# Altium PCB Micromouse_1_2.PcbDoc (part 1 of 2)
Units mm, origin at the board's own origin, x right, y up, seen from the top; angles counter-clockwise.
Board outline 75.15 x 101.5 mm, 2 copper layers (Top Layer, Bottom Layer); 116 components, 82 nets, 352 pads, 175 vias.
Unrouted connection lines stored in the file: 17.
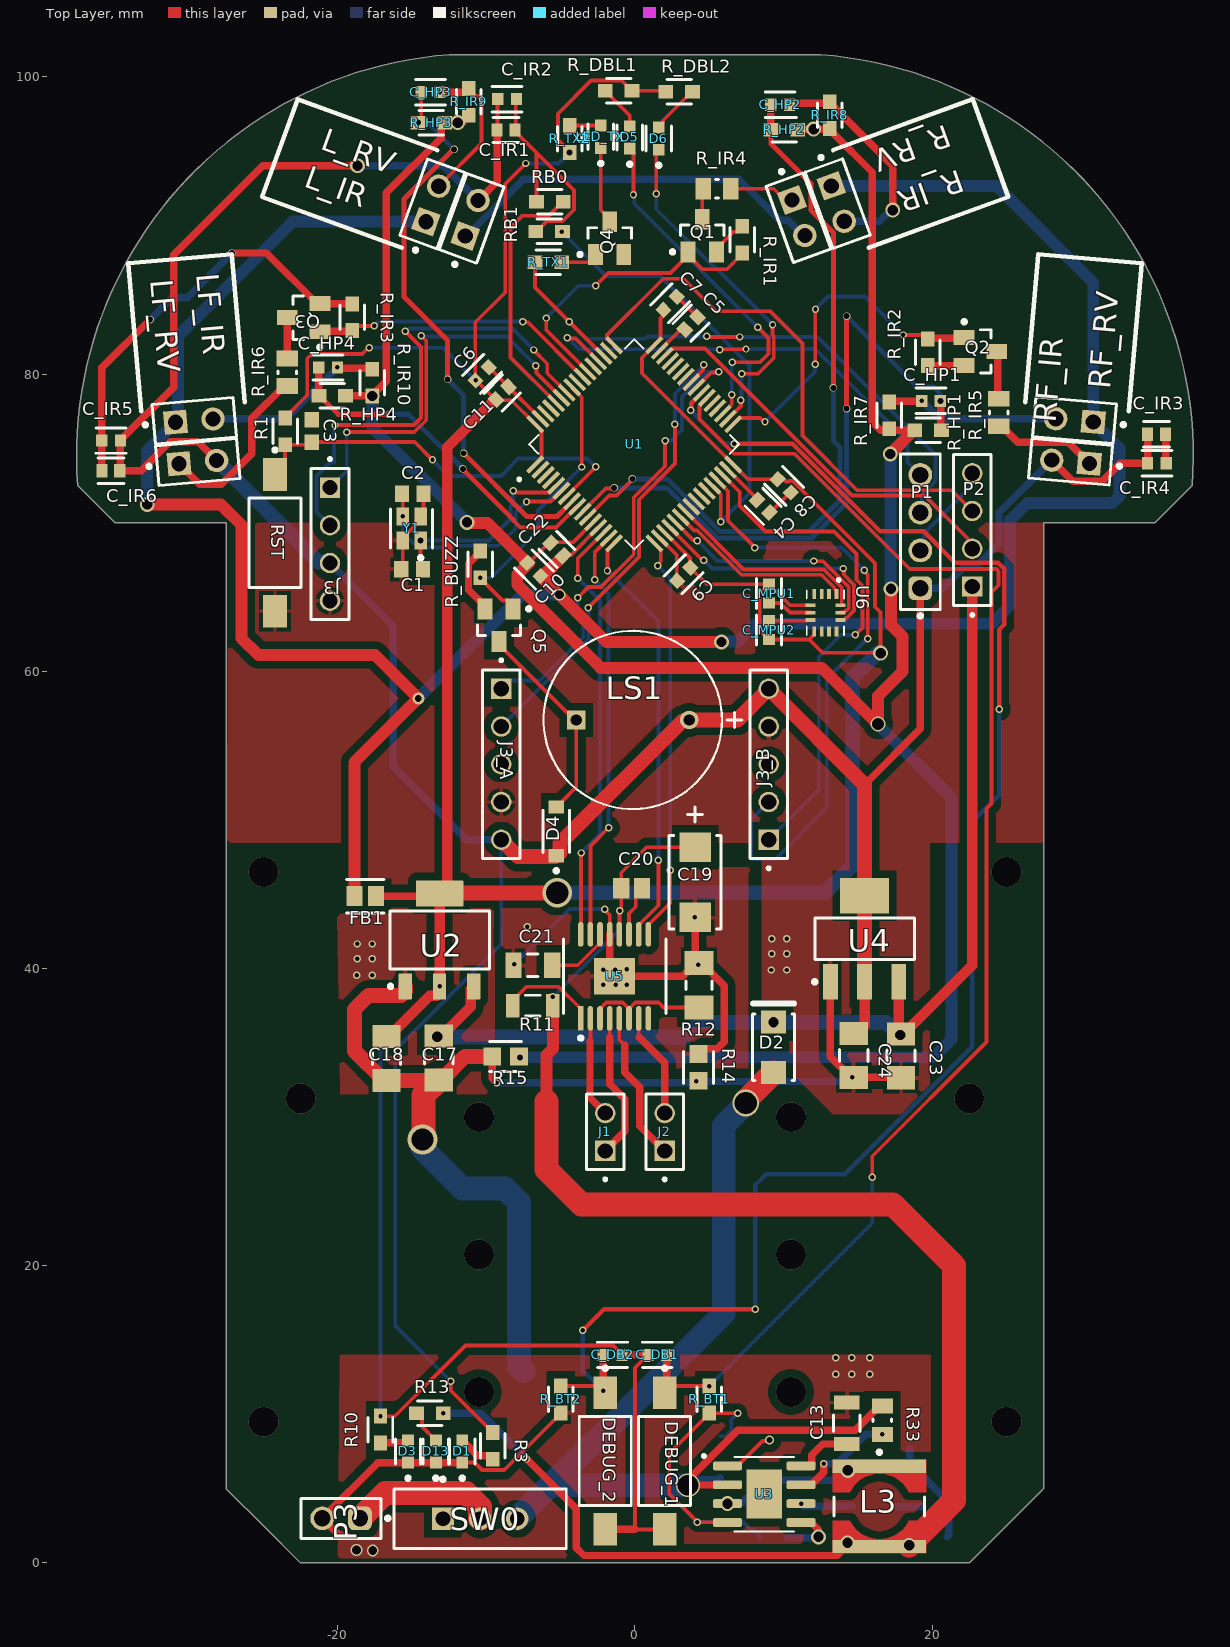
[diagram p0: Top Layer view]
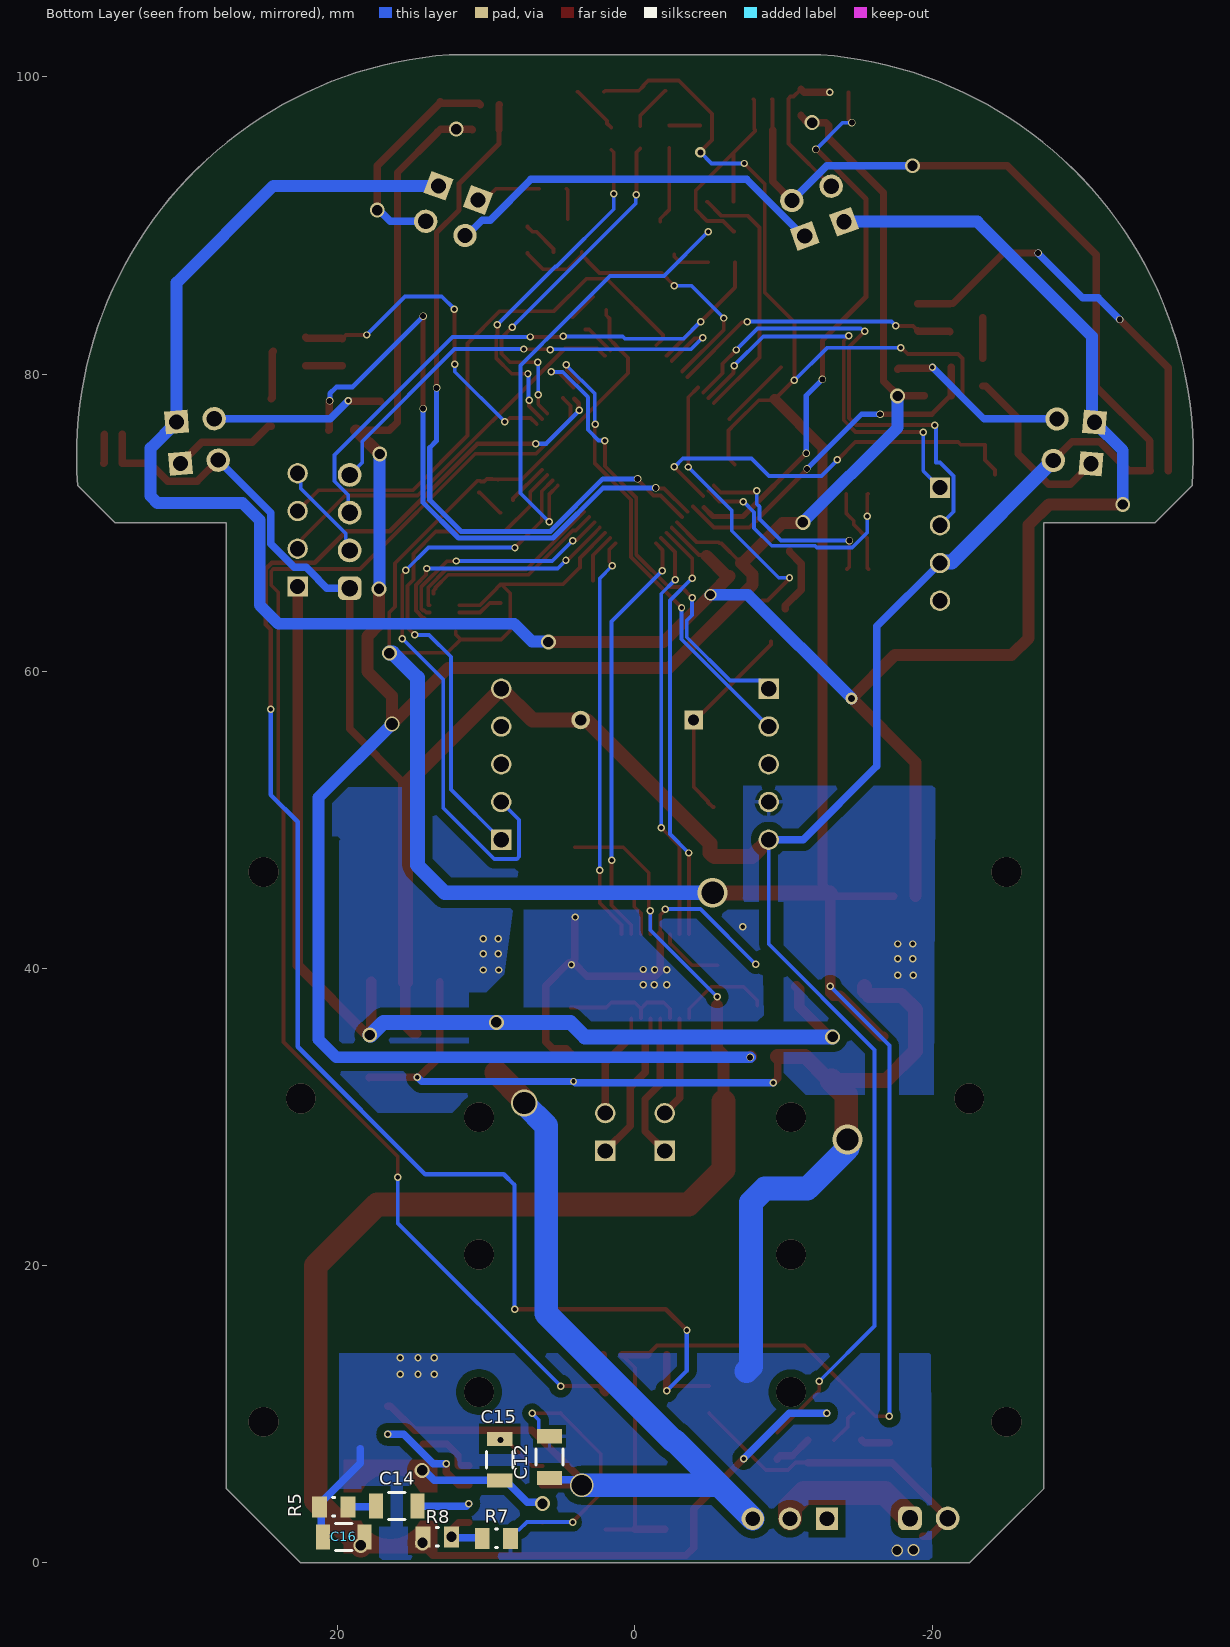
[diagram p1: Bottom Layer view, seen from below]
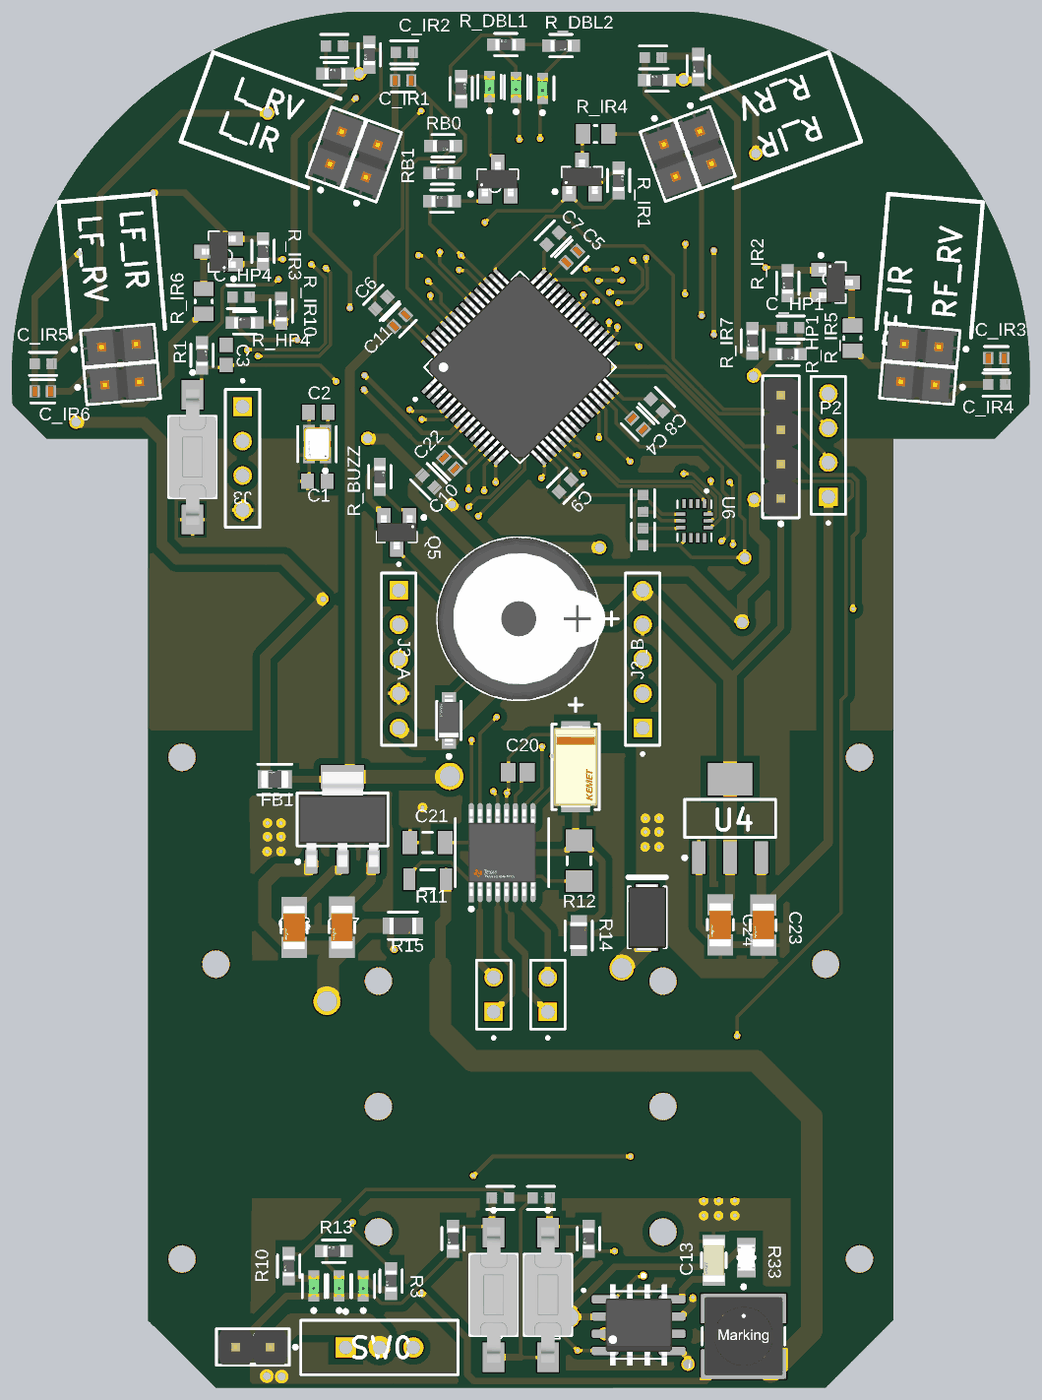
[diagram p3: 3D render of the assembled board from above, using the file's embedded part models]
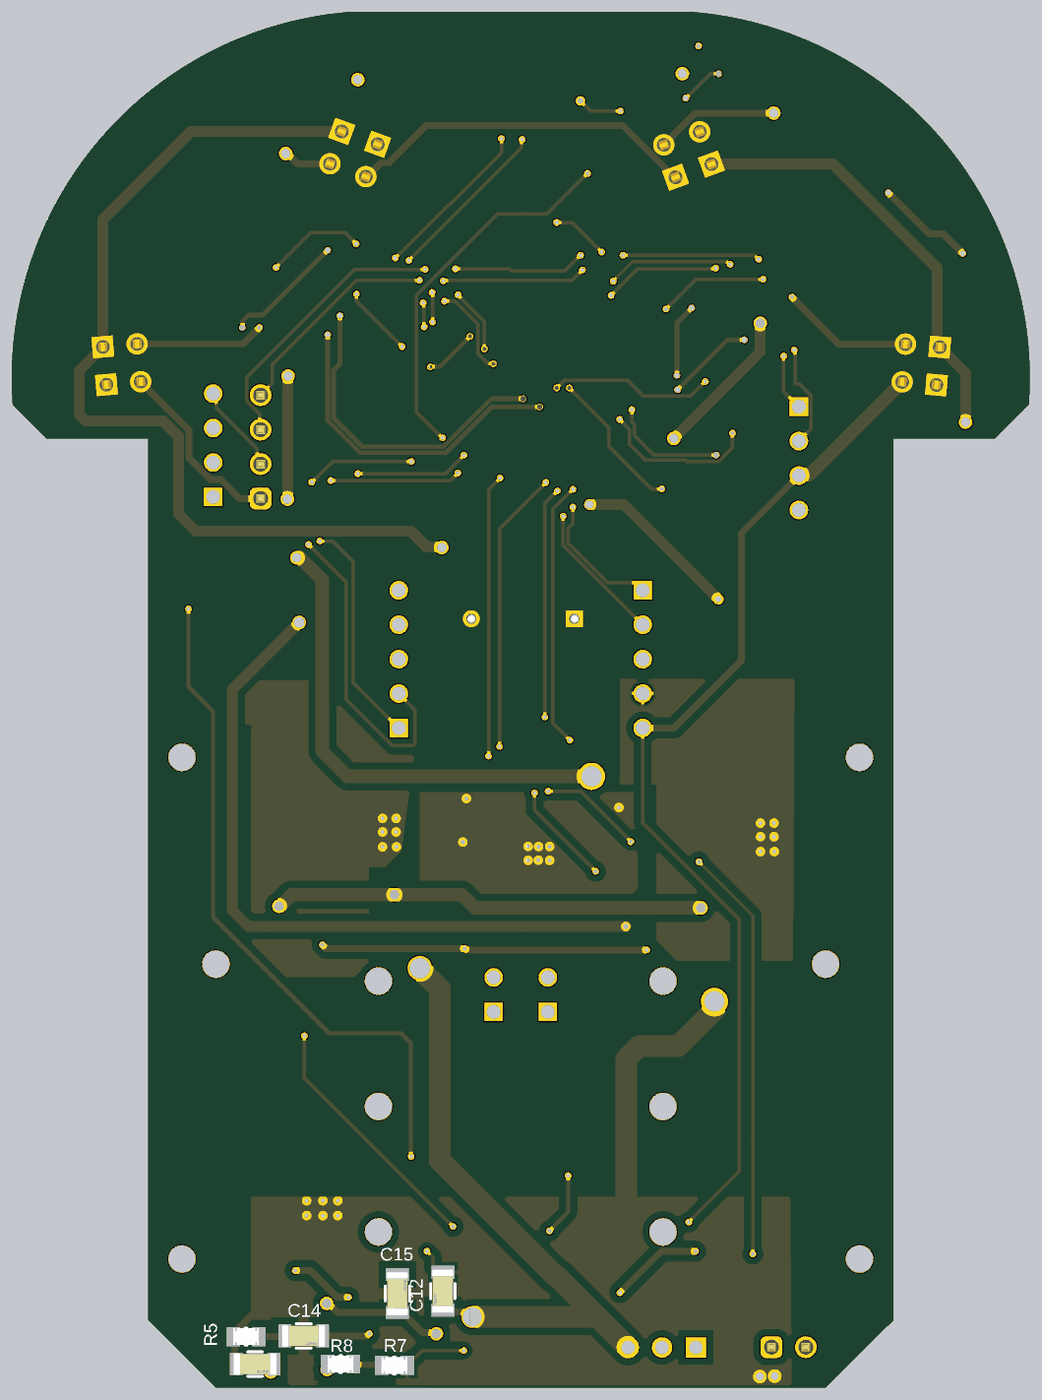
[diagram p4: 3D render of the assembled board from below, using the file's embedded part models]

## Layer stack, top to bottom
Top Solder: solder mask 0.0102, Solder Resist, Dk 3.5
Top Layer: signal copper 0.0356
Dielectric 1: dielectric 0.32, FR-4, Dk 4.8
Bottom Layer: signal copper 0.0356
Bottom Solder: solder mask 0.0102, Solder Resist, Dk 3.5

## Board outline
-27.5,4.975 -27.4,4.875 -24.988,2.487 -22.5,0 22.512,0.012 27.375,4.875 27.5,5 27.5,15.65 27.5,70 35,70 37.5,72.5 ccw(c10.5,74.5) 12.5,101.5 -12.5,101.5 ccw(c-10.5,74.5) -37.5,72.5 -35,70 -27.5,70

## Design rules (kind name [scope] priority, off if disabled: settings)
Clearance Clearance_U1_FinePitch [InComponent('U1') OR InComponent('R13') OR InComponent('R3') OR InComponent('R10') vs InComponent('U1') OR InComponent('R13') OR InComponent('R3') OR InComponent('R10')] p1: gap=0.1 ignorepadtopadclearanceinfootprint=FALSE
Clearance Clearance_1 [All] p2: gap=0.1 ignorepadtopadclearanceinfootprint=FALSE
Creepage [All] p1: checkdistance=0.5 applytopolygonpour=TRUE
PolygonConnect [All] p1: connectstyle=Relief reliefconductorwidth=0.254 reliefentries=4 polygonreliefangle="90 Angle" airgapwidth=0.254
RoutingVias [All] p1: holewidth=0.7 width=1 viastyle="Through Hole" minholewidth=0.3 minwidth=0.5 maxholewidth=1.5 maxwidth=2
SilkToSilkClearance [All] p1: silktosilkclearance=0.1
SolderMaskExpansion [All] p1: expansion=0.102 istentingtop=FALSE
SupplyNets "Schematic Supply Nets" [InNet('MGND')] p1: voltage=0.000
SupplyNets "Schematic Supply Nets_12" [InNet('V_ST')] p2: voltage=0.000
SupplyNets "Schematic Supply Nets_11" [InNet('AGND')] p3: voltage=0.000
SupplyNets "Schematic Supply Nets_10" [InNet('5V')] p4: voltage=0.000
SupplyNets "Schematic Supply Nets_9" [InNet('3.3V')] p5: voltage=0.000
SupplyNets "Schematic Supply Nets_7" [InNet('VA3.3')] p6: voltage=0.000
SupplyNets "Schematic Supply Nets_8" [InNet('VM')] p7: voltage=0.000
SupplyNets "Schematic Supply Nets_3" [InNet('GND')] p8: voltage=0.000
SupplyNets "Schematic Supply Nets_2" [InNet('VIN74')] p9: voltage=0.000
UnpouredPolygon UnpouredPolygon_1 [All] p1:
UnpouredPolygon [All] p2:
Width Width_1 [All] p1: maxlimit=1.6 minlimit=0.254 preferedwidth=0.5
28 further rules are at their usual default settings.

## Components (designator, comment, footprint, x,y, rotation, side; value= is the part's Value field where it differs from the comment)
C1 "22pF" CAPC1608X92X38ML15T08 -15,66.875 r0 top
C2 "22pF" CAPC1608X92X38ML15T08 -14.95,71.95 r180 top
C3 "1uF" CAPC1608X90X35NL15T15 -21.75,76.175 r90 top
C4 "2.2 uF" FP-C0603-CG-MFG 8.624,71.101 r315 top value=4.7uF
C5 "2.2uF" FP-C0603-CG-MFG 3.774,83.424 r45 top value=4.7uF
C6 "100nF" FP-CL10-IPC_C -10.282,80.018 r45 top
C7 "100nF" FP-CL10-IPC_C 2.368,84.768 r45 top
C8 "100nF" FP-CL10-IPC_C 10.043,72.482 r315 top
C9 "100nF" FP-CL10-IPC_C 3.282,66.532 r225 top
C10 "100nF" FP-CL10-IPC_C -6.807,66.857 r135 top
C11 "4.7 uF" FP-C0603-CG-MFG -8.926,78.724 r45 top value=4.7uF
C12 "10uF" FP-C1206C-EB-MFG 5.75,7.125 r90 bottom value="10 pF"
C13 "0.1uF" FP-C1206C-EB-MFG 14.25,9.4 r90 top value="10 pF"
C14 "3.9nF" FP-C1206C-EB-MFG 16.025,3.825 r0 bottom value="10 pF"
C15 "10nF" FP-C1206C-EB-MFG 9.1,6.95 r270 bottom value="10 pF"
C16 "22uF" FP-C1206C-EB-MFG 19.6,1.75 r0 bottom value="10 pF"
C17 "106" FP-GRT31C-0_2-IPC_A -13.2,33.975 r270 top
C18 "106" FP-GRT31C-0_2-IPC_A -16.725,33.95 r270 top
C19 "106" FP-T491C-MFG 4.05,45.8 r90 top value=10uF
C20 "103" CAPC2013X88X50LL20T25 -0.225,45.4 r0 top
C21 "225" CAPC3216X180X50LL20T25 -6.875,40.225 r180 top
C22 "4.7 uF" FP-C0603-CG-MFG -5.251,68.201 r135 top value=4.7uF
C23 "106" FP-GRT31C-0_2-IPC_A 17.9,34.125 r270 top
C24 "106" FP-GRT31C-0_2-IPC_A 14.725,34.15 r270 top
C_DB1 "100nF" FP-CL10-IPC_C 1.5,14 r0 top
C_DB2 "100nF" FP-CL10-IPC_C -1.5,14 r180 top
C_HP1 "100nF" FP-CL10-IPC_C 19.923,78.2 r180 top
C_HP2 "100nF" FP-CL10-IPC_C 9.773,98.125 r0 top
C_HP3 "100nF" FP-CL10-IPC_C -13.748,98.975 r0 top
C_HP4 "100nF" FP-CL10-IPC_C -20.648,80.45 r0 top
C_IR1 "4.7 uF" FP-C0603-CG-MFG -8.675,96.425 r0 top value=4.7uF
C_IR2 "100nF" FP-CL10-IPC_C -8.602,98.5 r0 top
C_IR3 "4.7 uF" FP-C0603-CG-MFG 35.1,75.95 r0 top value=4.7uF
C_IR4 "100nF" FP-CL10-IPC_C 35.123,74 r0 top
C_IR5 "100nF" FP-CL10-IPC_C -35.252,75.525 r180 top
C_IR6 "4.7 uF" FP-C0603-CG-MFG -35.275,73.5 r180 top value=4.7uF
C_MPU1 "100nF" FP-CL10-IPC_C 9.025,65.227 r270 top
C_MPU2 "100nF" FP-CL10-IPC_C 9.025,62.773 r90 top
D1 "RED" FP-LTST-C190GKT-MFG -11.625,7.5 r90 top
D2 "SS12-E3/61T" VISH-DO-214AC_V 9.325,34.7 r90 top
D3 "RED" FP-LTST-C190GKT-MFG -15.275,7.5 r90 top
D4 "MMSZ5232B" FP-MA02A-MFG -5.3,49.225 r90 top
D5 "RED" FP-LTST-C190GKT-MFG -0.35,95.925 r90 top
D6 "RED" FP-LTST-C190GKT-MFG 1.6,95.85 r90 top
D13 "RED" FP-LTST-C190GKT-MFG -13.4,7.5 r90 top
DEBUG_1 "" TECO-FSMSMTR_V 2,6.85 r270 top
DEBUG_2 "" TECO-FSMSMTR_V -2,6.85 r270 top
FB1 "1k 100Mhz" FP-BLM21-0_2-t0_85-e0_5-IPC_C -18.151,44.875 r180 top
J1 "TSW-102-07-G-S" SAMTEC_TSW-102-07-G-S -2,29 r90 top
J2 "TSW-102-07-G-S" SAMTEC_TSW-102-07-G-S 2,29 r90 top
J3 "TSW-104-06-L-S" SAMTEC_TSW-104-06-L-S -20.525,72.365 r270 top
J3_A "TSW-105-07-F-S" SAMTEC_TSW-105-07-F-S -9,53.745 r270 top locked
J3_B "TSW-105-07-F-S" SAMTEC_TSW-105-07-F-S 9,53.745 r90 top locked
L3 "10uH" WE-TPC_5818 16.45,3.8 r0 top
L_IR "TSW-102-07-G-S" FP-TSW-102-07-G-S-MFG -10.991,90.485 r70 top locked
L_RV "TSW-102-07-G-S" FP-TSW-102-07-G-S-MFG -13.639,91.451 r70 top locked
LED_TX "RED" FP-LTST-C190GKT-MFG -2.3,95.975 r90 top
LF_IR "TSW-102-07-G-S" FP-TSW-102-07-G-S-MFG -29.417,74.082 r5 top
LF_RV "TSW-102-07-G-S" FP-TSW-102-07-G-S-MFG -29.661,76.872 r5 top locked
LS1 "MCKPX-G1203A-K4056" FP-MCKPX-G1203A-K4056-MFG -0.15,56.725 r0 top
P1 "2.54" 61300411121 19.2,69.405 r90 top
P2 "TSW-104-06-L-S" SAMTEC_TSW-104-06-L-S 22.7,65.71 r90 top
P3 "2.54" 61300211121 -19.775,3 r180 top
Q1 "FDN335N" FAIR-SSOT3L-3_V 4.525,89.325 r90 top
Q2 "" FAIR-SSOT3L-3_V 23.25,81.525 r0 top
Q3 "" FAIR-SSOT3L-3_V -22.3,83.8 r180 top
Q4 "FDN335N" FAIR-SSOT3L-3_V -1.7,89.15 r90 top
Q5 "" FAIR-SSOT3L-3_V -9.15,63.1 r270 top
R1 "10k" FP-CPF0603-MFG -23.525,76.15 r270 top value=10KΩ
R3 "1k" FP-CPF0603-MFG -9.575,7.875 r90 top value=10KΩ
R5 "6.8K" FP-CRCW0805-e3-IPC_B 20.275,3.775 r180 bottom
R7 "10K" FP-CRCW0805-e3-IPC_B 9.326,1.65 r0 bottom
R8 "51K" FP-CRCW0805-e3-IPC_B 13.3,1.75 r180 bottom
R10 "1k" FP-CPF0603-MFG -17.125,8.975 r90 top value=10KΩ
R11 "47k" RESC3216X60X45LL10T20 -6.875,37.5 r180 top
R12 "0.2" RESC3216X89X51ML25T25 4.3,38.875 r90 top
R13 "1k" FP-CPF0603-MFG -13.8,10.075 r0 top value=10KΩ
R14 "o" FP-TFCR0805-MFG 4.275,33.35 r270 top
R15 "o" FP-TFCR0805-MFG -8.7,34.075 r180 top
R33 "100K" FP-CRCW0805-e3-IPC_B 16.65,9.6 r270 top
R_BT1 "47k" FP-CPF0603-MFG 5,11 r90 top value=10KΩ
R_BT2 "47k" FP-CPF0603-MFG -5,11 r90 top value=10KΩ
R_BUZZ "47k" FP-CPF0603-MFG -10.4,67.2 r270 top value=10KΩ
R_DBL1 "1k" FP-CPF0603-MFG -1.1,99.075 r0 top value=10KΩ
R_DBL2 "1k" FP-CPF0603-MFG 2.975,99 r180 top value=10KΩ
R_HP1 "3.3k" FP-CPF0603-MFG 19.725,76.225 r180 top value=10KΩ
R_HP2 "3.3k" FP-CPF0603-MFG 10.05,96.45 r0 top value=10KΩ
R_HP3 "3.3k" FP-CPF0603-MFG -13.7,96.925 r0 top value=10KΩ
R_HP4 "3.3k" FP-CPF0603-MFG -20.375,78.55 r0 top value=10KΩ
R_IR "TSW-102-07-G-S" FP-TSW-102-07-G-S-MFG 10.997,90.527 r290 top locked
R_IR1 "47k" FP-CPF0603-MFG 7.225,89.05 r270 top value=10KΩ
R_IR2 "47k" FP-CPF0603-MFG 19.7,81.475 r90 top value=10KΩ
R_IR3 "47k" FP-CPF0603-MFG -19.025,83.825 r270 top value=10KΩ
R_IR4 "5R6" RESC2013X50X30NL20T20 5.525,92.475 r0 top
R_IR5 "12" RESC2013X50X30NL20T20 24.475,77.425 r270 top
R_IR6 "12" RESC2013X50X30NL20T20 -23.4,80.125 r270 top
R_IR7 "47k" FP-CPF0603-MFG 17.1,77.225 r90 top value=10KΩ
R_IR8 "47k" FP-CPF0603-MFG 13.1,97.425 r90 top value=10KΩ
R_IR9 "47k" FP-CPF0603-MFG -11.175,98.325 r90 top value=10KΩ
R_IR10 "47k" FP-CPF0603-MFG -17.675,79.425 r90 top value=10KΩ
R_RV "TSW-102-07-G-S" FP-TSW-102-07-G-S-MFG 13.647,91.477 r290 top
R_TX1 "100k" FP-CPF0603-MFG -5.825,87.525 r0 top value=10KΩ
R_TX2 "1k" FP-CPF0603-MFG -4.4,95.825 r270 top value=10KΩ
RB0 "47k" FP-CPF0603-MFG -5.725,91.6 r180 top value=10KΩ
RB1 "47k" FP-CPF0603-MFG -5.775,89.6 r0 top value=10KΩ
RF_IR "TSW-102-07-G-S" FP-TSW-102-07-G-S-MFG 29.313,74.099 r175 top locked
RF_RV "TSW-102-07-G-S" FP-TSW-102-07-G-S-MFG 29.578,76.888 r175 top
RST "" TECO-FSMSMTR_V -24.225,68.65 r270 top
SW0 "4mm" ESWI-EG1218_V -10.425,2.975 r0 top
U1 "STM32F405RGT6" QFP50P1200X1200X160-64N -0.05,75.275 r45 top
U2 "LM1117IMP-3.3/NOPB" DCY0004A_N -13.15,41.925 r90 top
U3 "MP2307DN-LF-Z" SOIC127P600X170-9N 8.7,4.625 r0 top
U4 "LM1117MP-5.0" MP04A_N 15.45,42 r90 top
U5 "DRV8833PWPR" FP-PWP0016C-IPC_B -1.375,39.475 r90 top
U6 "BMG250" XDCR_BMG250 12.812,63.95 r270 top
Y1 "16MHz" FP-ABM10W-MFG -15.025,69.612 r90 top

## Footprints (in the part's own frame and the unit in brackets; to place one, negate y for a bottom-side part, rotate by r counter-clockwise, add the part's x,y. Pads: shape width x height; smd on the part's side, far side on the other; paste and mask are expansions set on the pad)
61300211121 [mm] "Pin Header, pitch 2.54 mm, THT, Vertical, single row, 2p"
  rrect50% 1.6x1.6 hole 1.1: 1(-1.27,0)
  round 1.6 hole 1.1: 2(1.27,0)
  silkscreen extent -3.26,-1.35 2.69,1.35, body extent -2.54,-1.27 2.54,1.27, height 8.57
61300411121 [mm] "Pin Header, pitch 2.54 mm, THT, Vertical, single row, 4p"
  rrect50% 1.6x1.6 hole 1.1: 1(-3.81,0)
  round 1.6 hole 1.1: 2(-1.27,0) 3(1.27,0) 4(3.81,0)
  silkscreen extent -5.8,-1.35 5.23,1.35, body extent -5.08,-1.27 5.08,1.27, height 8.57
CAPC1608X90X35NL15T15 [mm] "Chip Capacitor, 2-Leads, Body 1.60x0.81mm, IPC Medium Density"
  rect 1.05x1 smd: 1(-0.75,0) 2(0.75,0)
  body extent -0.88,-0.48 0.87,0.48, height 0.9
CAPC1608X92X38ML15T08 [mm] "Chip Capacitor, 2-Leads, Body 1.60x0.80mm, IPC Low Density"
  rect 0.95x1.1 smd: 1(-0.725,0) 2(0.725,0)
  body extent -0.87,-0.48 0.87,0.47, height 0.92
CAPC2013X88X50LL20T25 [mm] "Chip Capacitor, 2-Leads, Body 2.00x1.25mm, IPC High Density"
  rect 1.1x1.35 smd: 1(-0.7,0) 2(0.7,0)
  body extent -1.1,-0.72 1.1,0.72, height 0.88
CAPC3216X180X50LL20T25 [mm] "Chip Capacitor, 2-Leads, Body 3.20x1.60mm, IPC High Density"
  rect 1.1x1.7 smd: 1(-1.3,0) 2(1.3,0)
  silkscreen extent -0.35,-0.75 0.35,0.75, body extent -1.7,-0.9 1.7,0.9, height 1.8
DCY0004A_N [mm] "SOT223, 4-Leads, Body 6.7x3.7mm, Pitch 2.3mm, IPC Medium Density"
  rrect11% 1.75x0.9 smd: 1(-3.125,2.3) 2(-3.125,0) 3(-3.125,-2.3)
  rrect6% 1.75x3.2 smd: 4(3.125,0)
  silkscreen extent -3.25,-3.35 1.95,3.42, body extent -3.5,-3.25 3.5,3.25, height 1.62
ESWI-EG1218_V [mm] "THD, 3-Leads, Body 11.6x4mm, Pitch 2.5mm"
  rect 1.5x1.5 hole 1: 1(-2.5,0)
  round 1.5 hole 1: 2(0,0) 3(2.5,0)
  silkscreen extent -5.8,-2 5.8,2.77, body extent -5.8,-2 5.8,2, height 7.4
FAIR-SSOT3L-3_V [mm] "SOT23, 3-Leads, Body 2.92x1.4mm, Pitch 0.95mm"
  rect 1.4x1 smd: 1(-1.1,0.95) 2(-1.1,-0.95) 3(1.1,0)
  silkscreen extent -1.22,-1.46 0.7,2.12, body extent -1.26,-1.46 1.26,1.46, height 1.12
FP-ABM10W-MFG [mm]
  rect 1.2x0.85 smd paste+0 mask+0: 1(-0.813,-0.6) 2(0.813,-0.6) 3(0.813,0.6) 4(-0.813,0.6)
  silkscreen extent -2.1,-1.42 1.3,1.43, body extent -1.51,-1.15 1.51,1.15, height 0.25
FP-BLM21-0_2-t0_85-e0_5-IPC_C [mm]
  rect 1.055x1.356 smd paste+0 mask+0: 1(-0.726,0) 2(0.726,0)
  silkscreen extent -1.25,-1.12 1.25,1.12, body extent -1.35,-0.82 1.35,0.82, height 0.25
FP-C0603-CG-MFG [mm]
  rect 0.75x0.9 smd paste+0 mask+0: 1(-0.6,0) 2(0.6,0)
  silkscreen extent -0.87,-0.85 0.87,0.85, body extent -1.2,-0.6 1.2,0.6, height 0.25
FP-C1206C-EB-MFG [mm]
  rect 0.95x1.7 smd paste+0 mask+0: 1(-1.4,0) 2(1.4,0)
  silkscreen extent -0.55,-0.9 0.55,0.9, body extent -1.6,-0.8 1.6,0.8, height 0.88
FP-CL10-IPC_C [mm]
  rect 0.758x0.812 smd paste+0 mask+0: 1(-0.627,0) 2(0.627,0)
  silkscreen extent -1.01,-0.85 1.01,0.85, body extent -1.11,-0.55 1.11,0.55, height 0.25
FP-CPF0603-MFG [mm]
  rect 1x0.9 smd paste+0 mask+0: 1(-0.9,0) 2(0.9,0)
  silkscreen extent -0.82,-0.82 0.82,0.82, body extent -1.5,-0.55 1.5,0.55, height 0.25
FP-CRCW0805-e3-IPC_B [mm]
  rect 1.007x1.408 smd paste+0 mask+0: 1(-0.951,0) 2(0.951,0)
  silkscreen extent -0.07,-0.63 0.07,0.63, body extent -1,-0.63 1,0.63, height 0.5
FP-GRT31C-0_2-IPC_A [mm]
  rect 1.555x1.906 smd paste+0 mask+0: 1(-1.476,0) 2(1.476,0)
  silkscreen extent -0.4,-0.95 0.4,0.95, body extent -2.75,-1.45 2.75,1.45, height 0.25
FP-LTST-C190GKT-MFG [mm]
  rect 0.8x0.8 smd paste+0 mask+0: 1(-0.75,0) 2(0.75,0)
  silkscreen extent -1.92,-0.85 0.85,0.85, body extent -1.25,-0.55 1.25,0.55, height 0.25
FP-MA02A-MFG [mm]
  rect 0.88x1.02 smd paste+0 mask+0: 1(-1.635,0) 2(1.635,0)
  silkscreen extent -2.77,-0.9 1.43,0.9, body extent -2.17,-1 2.17,1, height 0.25
FP-MCKPX-G1203A-K4056-MFG [mm]
  rect 1.25x1.25 hole 0.75 paste-2539.97 mask+0: 1(-3.8,0)
  round 1.25 hole 0.75 paste-2539.97 mask+0: 2(3.8,0)
  silkscreen extent -6,-6 7.35,6, body extent -6.1,-6.1 6.1,6.1, height 0.25
FP-PWP0016C-IPC_B [mm]
  rect 1.655x0.381 smd paste+0 mask+0: 1(-2.825,2.275)
  rrect100% 1.655x0.381 smd paste+0 mask+0: 2(-2.825,1.625) 3(-2.825,0.975) 4(-2.825,0.325) 5(-2.825,-0.325) 6(-2.825,-0.975) 7(-2.825,-1.625) 8(-2.825,-2.275) 9(2.825,-2.275) 10(2.825,-1.625) 11(2.825,-0.975) 12(2.825,-0.325) 13(2.825,0.325) 14(2.825,0.975) 15(2.825,1.625) 16(2.825,2.275)
  rect 2.46x2.77 smd paste-1000 mask+0: 17(0,0)
  silkscreen extent -4.28,-3.45 2.5,3.45, body extent -3.9,-2.75 3.9,2.75, height 0.25
FP-T491C-MFG [mm]
  rect 1.99x2.13 smd paste+0 mask+0: 1(-2.36,0) 2(2.36,0)
  silkscreen extent -3.15,-1.75 5.07,1.75, body extent -3.48,-1.87 3.48,1.87, height 0.25
FP-TFCR0805-MFG [mm]
  rect 1.2x1.2 smd paste+0 mask+0: 1(-0.9,0) 2(0.9,0)
  silkscreen extent -1.07,-1 1.07,1, body extent -1.6,-0.8 1.6,0.8, height 0.25
FP-TSW-102-07-G-S-MFG [mm]
  rect 1.57x1.57 hole 1.02 paste-2539.97 mask+0: 1(-1.27,0)
  round 1.57 hole 1.02 paste-2539.97 mask+0: 2(1.27,0)
  silkscreen extent -3.42,-1.34 2.73,1.34, body extent -2.83,-1.44 2.83,1.44, height 0.25
MP04A_N [mm] "SOT223, 4-Leads, Body 6.5x3.5mm, Pitch 2.3mm, Lead Span 7mm, IPC Medium Density"
  rect 2.4x1 smd: 1(-2.9,2.3) 2(-2.9,0) 3(-2.9,-2.3)
  rect 2.4x3.3 smd: 4(2.9,0)
  silkscreen extent -3.02,-3.35 1.4,3.47, body extent -1.86,-3.35 1.86,3.35, height 1.8
QFP50P1200X1200X160-64N [mm]
  rrect25% 1.47x0.28 smd: 1(-5.67,3.75) 2(-5.67,3.25) 3(-5.67,2.75) 4(-5.67,2.25) 5(-5.67,1.75) 6(-5.67,1.25) 7(-5.67,0.75) 8(-5.67,0.25) 9(-5.67,-0.25) 10(-5.67,-0.75) 11(-5.67,-1.25) 12(-5.67,-1.75) 13(-5.67,-2.25) 14(-5.67,-2.75) 15(-5.67,-3.25) 16(-5.67,-3.75) 33(5.67,-3.75) 34(5.67,-3.25) 35(5.67,-2.75) 36(5.67,-2.25) 37(5.67,-1.75) 38(5.67,-1.25) 39(5.67,-0.75) 40(5.67,-0.25) 41(5.67,0.25) 42(5.67,0.75) 43(5.67,1.25) 44(5.67,1.75) 45(5.67,2.25) 46(5.67,2.75) 47(5.67,3.25) 48(5.67,3.75)
  rrect25% 0.28x1.47 smd: 17(-3.75,-5.67) 18(-3.25,-5.67) 19(-2.75,-5.67) 20(-2.25,-5.67) 21(-1.75,-5.67) 22(-1.25,-5.67) 23(-0.75,-5.67) 24(-0.25,-5.67) 25(0.25,-5.67) 26(0.75,-5.67) 27(1.25,-5.67) 28(1.75,-5.67) 29(2.25,-5.67) 30(2.75,-5.67) 31(3.25,-5.67) 32(3.75,-5.67) 49(3.75,5.67) 50(3.25,5.67) 51(2.75,5.67) 52(2.25,5.67) 53(1.75,5.67) 54(1.25,5.67) 55(0.75,5.67) 56(0.25,5.67) 57(-0.25,5.67) 58(-0.75,5.67) 59(-1.25,5.67) 60(-1.75,5.67) 61(-2.25,5.67) 62(-2.75,5.67) 63(-3.25,5.67) 64(-3.75,5.67)
  silkscreen extent -7.24,-5 5,5, body extent -6,-6 6,6, height 1.6
RESC2013X50X30NL20T20 [mm] "Chip Resistor, 2-Leads, Body 2.00x1.25mm, IPC Medium Density"
  rect 1.05x1.45 smd: 1(-0.925,0) 2(0.925,0)
  silkscreen extent -0.1,-0.63 0.1,0.63, body extent -1.1,-0.72 1.1,0.72, height 0.5
RESC3216X60X45LL10T20 [mm] "Chip Resistor, 2-Leads, Body 3.20x1.60mm, IPC High Density"
  rect 0.9x1.6 smd: 1(-1.35,0) 2(1.35,0)
  silkscreen extent -0.5,-0.7 0.5,0.7, body extent -1.65,-0.85 1.65,0.85, height 0.6
RESC3216X89X51ML25T25 [mm] "Chip Resistor, 2-Leads, Body 3.20x1.60mm, IPC Low Density"
  rect 1.6x1.95 smd: 1(-1.5,0) 2(1.5,0)
  silkscreen extent -0.3,-0.87 0.3,0.87, body extent -1.73,-0.92 1.73,0.92, height 0.89
SAMTEC_TSW-102-07-G-S [mm]
  rect 1.37x1.37 / inner round 1.37 / far side rect 1.37x1.37 hole 1.02: 01(-1.27,0)
  round 1.37 hole 1.02: 02(1.27,0)
  silkscreen extent -3.29,-1.27 2.54,1.27
SAMTEC_TSW-104-06-L-S [mm]
  rect 1.37x1.37 hole 1.02: 01(0,0)
  round 1.37 hole 1.02: 02(2.54,0) 03(5.08,0) 04(7.62,0)
  silkscreen extent -2.02,-1.27 8.89,1.27
SAMTEC_TSW-105-07-F-S [mm]
  rect 1.37x1.37 hole 1.02: 01(-5.08,0)
  round 1.37 hole 1.02: 02(-2.54,0) 03(0,0) 04(2.54,0) 05(5.08,0)
  silkscreen extent -7.1,-1.27 6.35,1.27
SOIC127P600X170-9N [mm]
  rrect50% 1.97x0.6 smd: 1(-2.475,1.905) 2(-2.475,0.635) 3(-2.475,-0.635) 4(-2.475,-1.905) 5(2.475,-1.905) 6(2.475,-0.635) 7(2.475,0.635) 8(2.475,1.905)
  rect 2.41x3.3 smd paste-3: 9(0,0)
  silkscreen extent -4.16,-2.5 2,2.67, body extent -2.45,-3 2.45,3, height 1.7
TECO-FSMSMTR_V [mm] "SMD, 2-Leads, Body 6x3.5mm, Pitch 9.19mm"
  rect 2.2x1.6 smd: 1(-4.595,0)
  rect 2.18x1.6 smd: 2(4.595,0)
  silkscreen extent -6.37,-1.75 3,1.75, body extent -4.98,-1.75 4.98,1.75, height 4.4
VISH-DO-214AC_V [mm] "Molded Diode, 2-Leads, Body 4.5x2.79mm"
  rect 1.52x1.68 smd: 1(-1.7,0) 2(1.7,0)
  silkscreen extent -2.25,-1.4 2.96,1.4, body extent -2.47,-1.4 2.47,1.4, height 2.29
WE-TPC_5818 [mm] "Power Inductor, SMD, 2-Leads, body 5.8x5.8mm"
  rect 6.3x0.9 smd paste-403.566 mask-403.566: 1(0,2.7) 2(0,-2.7)
  Top Layer region: -3.15,0.95 -1.984,0.95 -1.984,0.95 -1.374,1.718 -0.491,2.145 0.49,2.145 1.374,1.718 1.984,0.95 1.984,0.95 3.15,0.95 3.15,0.95 3.15,3.15 -3.15,3.15
  Top Layer region: 3.15,-0.95 1.984,-0.95 1.984,-0.95 1.374,-1.718 0.491,-2.145 -0.49,-2.145 -1.374,-1.718 -1.984,-0.95 -1.984,-0.95 -3.15,-0.95 -3.15,-0.95 -3.15,-3.15 3.15,-3.15
  silkscreen extent -3.05,-0.65 3.05,3.77, body extent -2.9,-2.9 2.9,2.9, height 1.8
XDCR_BMG250 [mm]
  rect 0.675x0.25 smd: 1(-1.262,0.75) 2(-1.262,0.25) 3(-1.262,-0.25) 4(-1.262,-0.75) 8(1.262,-0.75) 9(1.262,-0.25) 10(1.262,0.25) 11(1.262,0.75)
  rect 0.25x0.675 smd: 5(-0.5,-1.012) 6(0,-1.012) 7(0.5,-1.012) 12(0.5,1.012) 13(0,1.012) 14(-0.5,1.012)
  silkscreen extent -2.3,-1.25 1.5,1.25

## Part data
C1 C2: library part CMP-1035-00826-2, Manufacturer=Vitramon, Part Number=VJ0603A220FXBAC
C3: library part CMP-2006-04534-1, Manufacturer="AVX Interconnect / Elco", Part Number=0603YD105MAT2A
C4 C5 C11 C22 C_IR1 C_IR3 C_IR6: library part CMP-2006-02256-2, "CAP CER 4.7UF 6.3V X5R 0603", Capacitance=4.7uF, Manufacturer=Kemet, Manufacturer Part Number=C0603C475K9PACTU, Package=C0603-CG, Temperature="-55°C to +85°C", Temperature Characteristic=X5R, Temperature Coefficient=15%, Temperature Range High=+85°C, Temperature Range Low=-55°C, Tolerance=10%, Voltage Rating=6.3V, Automotive=No, Category=Cap, ComponentLink2Description=Datasheet, ComponentLink2URL=https://content.kemet.com/datasheets/KEM_C1006_X5R_SMD.pdf, Device Class L1="Passive Components", Device Class L2=Capacitors, Device Class L3="Ceramic Capacitors", Digikey Description="CAP CER 4.7UF 6.3V X5R 0603", Height=0.9mm, Ipc Land Pattern Name=CAPC16080X80, Lead Free=Yes, Material=Ceramic, Mouser Description="Multilayer Ceramic Capacitors MLCC - SMD/SMT 6.3volts 4.7uF X5R 10%", Octopart=https://octopart.com/c0603c475k9pactu-kemet-104242, RoHS=TRUE
C6 C7 C8 C9 C10 C_DB1 C_DB2 C_HP1 C_HP2 C_HP3 C_HP4 C_IR2 C_IR4 C_IR5 C_MPU1 C_MPU2: library part CMP-13271-001423-1, "Cap Ceramic 100nF 25V X7R ±10% Pad SMD 0603 +125°C T/R", Case Code (Imperial)=0603, Case Code (Metric)=1608, Dielectric=X7R, Max Operating Temperature=125°C, Min Operating Temperature=-55°C, Tolerance=10%, Voltage Rating=25V, Capacitance=100nF, Case/Package=0603, Depth=0.8mm, Height=0.8mm, Length=1.6mm, Mount="Surface Mount", Packaging="Tape and Reel", Radiation Hardening=No, Thickness=0.035inch, Width=0.031inch
C12: library part CMP-1037-00646-2, "C1206 10 uF C0G 5.00% 50 V", Capacitance="10 pF", Manufacturer=KEMET, Manufacturer Part Number=C1206C100J5GAC, Package=C1206C-EB, Temperature="-55°C to +150°C", Temperature Characteristic=C0G, Temperature Coefficient=15%, Temperature Range High=+150°C, Temperature Range Low=-55°C, Tolerance=0.05, Voltage Rating="50 V", Automotive=Yes, Automotive Grade="Grade 0", Category=Cap, ComponentLink2Description=Datasheet, ComponentLink2URL=https://content.kemet.com/datasheets/KEM_C1007_X8R_ULTRA_150C_SMD.pdf, Device Class L1="Passive Components", Device Class L2=Capacitors, Device Class L3="Ceramic Capacitors", Height=0.88mm, Ipc Land Pattern Name=CAPC320160X78, Lead Free=Yes, Material=Ceramic, Mouser Description="Multilayer Ceramic Capacitors MLCC - SMD/SMT 50volts 10pF 5% C0G", Octopart=https://octopart.com/c1206c100j5gac-kemet-1357555, RoHS=TRUE
C13 C15 C16: library part CMP-1037-00646-2, "C1206 10 pF C0G 5.00% 50 V", Capacitance="10 pF", Manufacturer=KEMET, Manufacturer Part Number=C1206C100J5GAC, Package=C1206C-EB, Temperature="-55°C to +150°C", Temperature Characteristic=C0G, Temperature Coefficient=15%, Temperature Range High=+150°C, Temperature Range Low=-55°C, Tolerance=0.05, Voltage Rating="50 V", Automotive=Yes, Automotive Grade="Grade 0", Category=Cap, ComponentLink2Description=Datasheet, ComponentLink2URL=https://content.kemet.com/datasheets/KEM_C1007_X8R_ULTRA_150C_SMD.pdf, Device Class L1="Passive Components", Device Class L2=Capacitors, Device Class L3="Ceramic Capacitors", Height=0.88mm, Ipc Land Pattern Name=CAPC320160X78, Lead Free=Yes, Material=Ceramic, Mouser Description="Multilayer Ceramic Capacitors MLCC - SMD/SMT 50volts 10pF 5% C0G", Octopart=https://octopart.com/c1206c100j5gac-kemet-1357555, RoHS=TRUE
C14: library part CMP-1037-00646-2, "C1206 4.8nF C0G 5.00% 50 V", Capacitance="10 pF", Manufacturer=KEMET, Manufacturer Part Number=C1206C100J5GAC, Package=C1206C-EB, Temperature="-55°C to +150°C", Temperature Characteristic=C0G, Temperature Coefficient=15%, Temperature Range High=+150°C, Temperature Range Low=-55°C, Tolerance=0.05, Voltage Rating="50 V", Automotive=Yes, Automotive Grade="Grade 0", Category=Cap, ComponentLink2Description=Datasheet, ComponentLink2URL=https://content.kemet.com/datasheets/KEM_C1007_X8R_ULTRA_150C_SMD.pdf, Device Class L1="Passive Components", Device Class L2=Capacitors, Device Class L3="Ceramic Capacitors", Height=0.88mm, Ipc Land Pattern Name=CAPC320160X78, Lead Free=Yes, Material=Ceramic, Mouser Description="Multilayer Ceramic Capacitors MLCC - SMD/SMT 50volts 10pF 5% C0G", Octopart=https://octopart.com/c1206c100j5gac-kemet-1357555, RoHS=TRUE
C17 C18 C23 C24: library part CMP-06035-000076-2, "Multi-Layer Ceramic Capacitor 10uF 50V X5R ±10% 1206 Emboss T/R", Capacitance=10uF, Case Code (Imperial)=1206, Case Code (Metric)=3216, Dielectric=X5R, Max Operating Temperature=85°C, Min Operating Temperature=-55°C, Ratings=AEC-Q200, Tolerance=10%, Voltage Rating=50V, Case/Package=1206, Length=0.126inch, Mount="Surface Mount", Packaging="Cut Tape", Thickness=0.071inch, Voltage Rating (DC)=50V, Width=0.063inch
C19: library part CMP-03017-000001-1, "CAP TANT 10UF 10% 25V 2312", Capacitance=10uF, Leakage Current=2.5uA, Manufacturer=Kemet, Manufacturer Part Number=T491C106K025AT, Package=T491C, Ripple Current=271mA, Temperature="-55°C to +125°C", Temperature Range High=+125°C, Temperature Range Low=-55°C, Tolerance=10%, Voltage Rating=25V, Automotive=No, Category=Cap, ComponentLink2Description=Datasheet, ComponentLink2URL=https://content.kemet.com/datasheets/KEM_T2005_T491.pdf, Device Class L1="Passive Components", Device Class L2=Capacitors, Device Class L3="Tantalum Capacitors", Digikey Description="CAP TANT 10UF 10% 25V 2312", Dissipation Factor=6%, Esr=1.5Ω, Height=2.8mm, Lead Free=Yes, Life=2000Hours, Material=Tantalum, Mouser Description="Tantalum Capacitors - Solid SMD 25V 10uF 10% C", Octopart=https://octopart.com/t491c106k025at-kemet-126002, RoHS=TRUE, Standoff Height=0mm
C20: library part CMP-2007-00266-1, Manufacturer=Kemet, Part Number=C0805C103K5RACTU
C21: library part CMP-1037-04831-2, "Chip Capacitor, 2.2 uF, +/- 10%, 50 V, -55 to 125 degC, 1206 (3216 Metric), RoHS, Tape and Reel", Capacitance=2.2uF, Capacitance - nF=2200nF, Case Code - in=1206, Case Code - mm=3216, Case Height=1.6mm, Case Length=3.2mm, Dielectric=X7R, Manufacturer=Kemet, Maximum Operating Temperature=+125C, Minimum Operating Temperature=-55C, Operating Temperature Range=-55Cto+125C, Package / Case=1206(3216metric), Package Description="2-Pin Surface Mount Device, Body 3.2 x 1.6 mm", Temperature Coefficient / Code=+/-15%, Tolerance=10%, Voltage Rating=50V, Brand=Kemet, Case Width=1.6mm, Class=Class1, Datasheet URL=http://www.kemet.com/docfinder?Partnumber=C1206C225K5RACTU, Datasheet Version=02/2016, Dimensions=1.6mmWx3.2mmLx1.6mmH, Factory Pack Quantity=2000, Manufacturer URL=http://www.kemet.com/, Mounting Technology=SurfaceMount, Package Reference=1206, Packaging=Reel, Product=GeneralTypeMLCCs, Product Category=MultilayerCeramicCapacitorsMLCC-SMD/SMT, RoHS=Details, Series=C1206C, Termination Style=SMD/SMT, Type=SMDMLCCX7R6.3-250VDCCommericalGrade, Voltage Rating DC=50V
D1 D3 D5 D6 D13 LED_TX: library part CMP-22017-000005-2, "LED GREEN CLEAR CHIP SMD", Case Code (Imperial)=0603, Case Code (Metric)=1608, Color=Green, Forward Current=30mA, Forward Voltage=2.1V, Lens Color=Colorless, Max Operating Temperature=85°C, Min Operating Temperature=-55°C, Package Quantity=1, Power Dissipation=100mW, Reverse Voltage=5V, Test Current=10mA, Voltage=2V, Case/Package=0603, Depth=0.8mm, Dominant Wavelength=569nm, Height=0.8mm, Illumination Color=Green, Lead Free="Lead Free", Length=1.6mm, Lens Style=Clear, Lens Transparency=Clear, Luminous Intensity=6mcd, Mount="Surface Mount", Number of Elements=1, Number of LEDs=1, Number of Pins=2, Packaging="Tape and Reel", Power Rating=100mW, Radiation Hardening=No, Viewing Angle=130°, Wavelength=565nm, Width=0.8mm
D2: library part CMP-004-00017-2, "Schottky Barrier Rectifier, 20 V, 1 A, -65 to 150 degC, 2-Pin DO-214AC (SMA), RoHS, Tape and Reel", Case/Package=SMA, Forward Current=1A, Forward Voltage=500mV, Manufacturer="Vishay Semiconductor", Max Operating Temperature=125°C, Max Surge Current=40A, Min Operating Temperature=-65°C, Package Description="2-Pin Surface Mount Device, Body 4.245 x 2.665 mm", Package Quantity=1800, Package Reference="DO-214AC (SMA)", Peak Reverse Current=6mA, Datasheet URL=http://www.vishay.com/docs/88746/ss12.pdf, Datasheet Version=Aug-15, Manufacturer URL=http://www.vishay.com/, Mounting Technology=SM, Packaging=TapeandReel, Pins=2, RoHS Compliant=True
D4: library part CMP-00278-11829623-1, "MMSZ5232B MMSZ523 Series 500 mW 5.6 V 10 mA SMT Half-Watt Zener Diode SOD-123", Forward Voltage=900mV, Max Junction Temperature (Tj)=150°C, Max Power Dissipation=500mW, Max Reverse Leakage Current=5µA, Min Operating Temperature=-55°C, Reverse Voltage=3V, Test Current=20mA, Tolerance=5%, Voltage Rating (DC)=5.6V, Contact Plating=Tin, Element Configuration=Single, ESD Protection=No, Height=1.28mm, Impedance=11Ω, Lead Free="Lead Free", Length=2.85mm, Max Operating Temperature=150°C, Mount="Surface Mount", NexarPartId=11829623, Number of Pins=2, Packaging="Cut Tape", Peak Reverse Current=5µA, Power Dissipation=500mW, Power Rating=500mW, Radiation Hardening=No, REACH SVHC="No SVHC", RoHS=Compliant, Voltage Tolerance=5%, Weight=30mg, Width=1.8mm, Working Voltage=5.6V, Zener Current=20mA, Zener Voltage=5.6V
DEBUG_1 DEBUG_2 RST: library part CMP-2000-07501-1, "FSMSM Push Button Switch, 50 mA, -35 to 85 degC, 2-Pin SMD, RoHS, Tape and Reel", Case\/Package=SMD/SMT, Contact Current Rating=50mA, Contact Resistance=100mOhm, Manufacturer="TE Connectivity", Max Operating Temperature=85degC, Max Voltage Rating (DC)=12V, Min Operating Temperature=-35degC, Operating Force=180gf, Package Description="2-Pin Surface Mount Device, Body 6 x 3.5 mm, Pitch 9.19 mm", Package Quantity=1800, Package Reference=FSMSMTR, Voltage Rating (DC)=24V, Actuator Length=1.07mm, Actuator Material=Polyamide, Contact Material=Brass, Contact Plating=Silver, Current Rating=50mA, Datasheet URL=http://www.te.com/commerce/DocumentDelivery/DDEController?Action=showdoc&DocId=Customer+Drawing%7F1437566-3%7FC2%7Fpdf%7FEnglish%7FENG_CD_1437566-3_C2_1437566_3_1_c.dwg.pdf%7F1437566-4, Datasheet Version="Rev. C2, 08/2014", Electrical Life=20000Cycles, ELV=Compliant, Illumination Type=Illuminated, Lead Free=LeadFree, Manufacturer URL=http://www.te.com/, Mechanical Life=20000Cycles, Mount=SurfaceMount, Mounting Technology=SurfaceMount, Orientation=Straight, Packaging=TapeandReel, REACH SVHC=Unknown, RoHSCompliant=true, Switch Travel=0.25mm, Termination=GullWing, Throw Configuration=SPST
FB1: library part CMP-06046-002606-1, "Chip Ferrite Bead, 0805, 60Ω @ 100MHz, 0.02Ω, 25%, 1.9A", RoHS Compliant=No
J1 J2: Package=None, Availability=Unavailable, MF=Samtec, MP=TSW-102-07-G-S, Price=None
J3 P2: library part CMP-034-000000-1, Package=None, Availability=Unavailable, Component Type=Standard, Design Item ID=TSW-104-06-L-S, MP=TSW-104-06-L-S, Pin Count=4, Price=None, Source=TSW-104-06-L-S.SchLib
J3_A J3_B: library part CMP-023-000001-1, Package=None, Availability=Unavailable, Component Type=Standard, Design Item ID=TSW-105-07-F-S, MF=Samtec, MP=TSW-105-07-F-S, Pin Count=5, Price=None, Source=TSW-105-07-F-S.SchLib
L3: library part CMP-0227-00416-3, Ambient Temperature Range High=95°C, Ambient Temperature Range Low=-40°C, Case Code (Imperial)=2323, Case Code (Metric)=5858, Current Rating=1.45A, DC Resistance (DCR)=70mΩ, Inductance=6.2µH, Inductance Tolerance=30%, Max Operating Temperature=125°C, Saturation Current=1.6A, Self Resonant Frequency=45MHz, Test Frequency=100kHz, Case/Package=2323, Composition=Wirewound, Core Material=Ferrite, Depth=5.8mm, Height=1.8mm, Height - Seated (Max)=2.0066mm, Length=5.8mm, Max DC Current=1.45A, Min Operating Temperature=-40°C, Mount="Surface Mount", NexarPartId=22866864, Number of Pins=2, Packaging="Cut Tape (CT)", REACH SVHC=Unknown, RMS Current (Irms)=1.45A, RoHS=Compliant, Shielding=Shielded, Termination=SMD/SMT, Tolerance=30%, Weight=248.001628mg, Width=5.8mm
L_IR L_RV LF_IR LF_RV R_IR R_RV RF_IR RF_RV: library part CMP-02766-000084-1, "CONN HEADER VERT 2POS 2.54MM", Current Rating=6.3A, Manufacturer=Samtec, Temperature="-55°C to +125°C", Temperature Range High=+125°C, Temperature Range Low=-55°C, Voltage Rating=550V, Automotive=No, Category=Conn, ComponentLink2Description=Datasheet, ComponentLink2URL=http://suddendocs.samtec.com/catalog_english/tsw_th.pdf, Conn Gender=Male, Conn Orientation=Straight, Contact Material=Gold,Nickel, Device Class L1=Connectors, Device Class L2="Headers and Wire Housings", Device Class L3=unset, Digikey Description="CONN HEADER VERT 2POS 2.54MM", Footprint Url=http://suddendocs.samtec.com/prints/tsw-xxx-xx-x-x-xx-xxx-footprint.pdf, Height=8.71mm, Lead Free=Yes, Manufacturer Part Number=TSW-102-07-G-S, Mouser Description="Conn Unshrouded Header HDR 2 POS 2.54mm Solder ST Thru-Hole Automotive Bulk", Number of Contacts=2, Number of Rows=1, Octopart=https://octopart.com/tsw-102-07-g-s-samtec-272197, Package=TSW-102-07-G-S, Pitch=2.54mm, RoHS=TRUE
LS1: library part CMP-12433-000001-1, "MAGNETIC BUZZER AND TRANSDUCER - More Details", Current=30mA, Frequency=2300Hz, Manufacturer="Multicomp Pro", Max Supply Voltage=5V, Min Supply Voltage=2V, Operating Supply Voltage=3V, Package=0, Temperature="-20°C to +70°C", Temperature Range High=+70°C, Temperature Range Low=-20°C, Automotive=No, Category=Speak, ComponentLink2Description=Datasheet, ComponentLink2URL=http://www.farnell.com/datasheets/1498149.pdf?_ga=2.17855225.1157923166.1572356775-536200964.1569240579, Device Class L1=Electromechanical, Device Class L2="Audio Products", Device Class L3=Buzzers, Height=9.5mm, Lead Free=Yes, Manufacturer Part Number=MCKPX-G1203A-K4056, Octopart=https://octopart.com/mckpx-g1203a-k4056-multicomp-12157154, RoHS=TRUE, Standoff Height=0.5mm
P1: library part CMP-1502-01064-3, Color=Black, Contact Resistance=20mΩ, Current Rating=3A, Max Operating Temperature=105°C, Min Operating Temperature=-40°C, Operating Supply Voltage=250V, Connector Type="Male Pin", Contact Material=Copper, Contact Mating Length=5.9944mm, Contact Plating=Gold, Gender=Male, Height=8.89mm, Lead Free="Lead Free", Lead Pitch=2.54mm, Mount="Through Hole", NexarPartId=32855522, Number of Contacts=4, Number of Pins=4, Number of Positions=4, Number of Rows=1, Orientation=Vertical, Packaging=Bulk, Pitch=2.54mm, REACH SVHC=Unknown, RoHS=Compliant, Termination=Solder, Voltage Rating=250V
P3: library part CMP-1712-00002-6, Color=Black, Contact Resistance=20mΩ, Current Rating=3A, Max Operating Temperature=125°C, Min Operating Temperature=-40°C, Operating Supply Voltage=250V, Connector Type="Male Pin", Contact Gender=Male, Contact Material=Copper, Contact Mating Length=5.9944mm, Contact Plating=Gold, Gender=Male, Height=8.94mm, Housing Material=PBT, Lead Free="Lead Free", Lead Pitch=2.54mm, Mount="Through Hole", NexarPartId=20081794, Number of Contacts=2, Number of Pins=2, Number of Positions=2, Number of Rows=1, Orientation=Vertical, Packaging=Bulk, Pitch=2.54mm, REACH SVHC="No SVHC", RoHS=Compliant, Termination="Through Hole", Voltage Rating=250V
Q1 Q2 Q3 Q4 Q5: library part CMP-2000-06249-1, "N-Channel Specified PowerTrench(R) MOSFET, 2.5 V, 1.7 A, -55 to 150 degC, 3-Pin SSOT3L, RoHS, Tape and Reel", Manufacturer=FairchildSemiconductor, Maximum Continuous Drain Current=1.7A, Maximum Drain Source Voltage=20V, Maximum Gate Source Voltage=±8V, Operating Temperature=-55to150°C, Package=3SuperSOT, Package Description="3-Pin Small Outline Transistor, Body 2.92 x 1.4 mm, Pitch 0.95 mm", Package Reference=SSOT3L, Package Version="Rev. 3, 05/2015", Category=MOSFET, Channel Mode=Enhancement, Channel Type=N, Datasheet URL=https://www.fairchildsemi.com/datasheets/FD/FDN335N.pdf, Datasheet Version="Rev. C, 04/1999", Manufacturer URL=https://www.fairchildsemi.com/, Mounting=SurfaceMount, Mounting Technology=SurfaceMount, Package URL=https://www.fairchildsemi.com/package-drawings/MA/MA03B.pdf, Packaging=Tape&Reel, Rad Hard=No, RDS-on=0.07@4.5VOhm, Typical Fall Time=3ns, Typical Rise Time=8.5ns, Typical Turn-Off Delay Time=11ns, Typical Turn-On Delay Time=5ns
R1 R3 R10 R13 R_BT1 R_BT2 R_BUZZ R_DBL1 R_DBL2 R_HP1 R_HP2 R_HP3 R_HP4 R_IR1 R_IR2 R_IR3 R_IR7 R_IR8 R_IR9 R_IR10 R_TX1 R_TX2 RB0 RB1: library part CMP-03211-003506-1, "RES SMD 10KΩ 0.5% 1/16W 0603", Manufacturer="TE Connectivity", Manufacturer Part Number=CPF0603D10KE, Package=CPF0603, Power Rating=0.063W, Resistance=10KΩ, Temperature="-55°C to +155°C", Temperature Coefficient=25ppm/°C, Temperature Range High=+155°C, Temperature Range Low=-55°C, Tolerance=0.5%, Voltage Rating=50V, Automotive=No, Category=Res, ComponentLink2Description=Datasheet, ComponentLink2URL=https://www.te.com/commerce/DocumentDelivery/DDEController?Action=showdoc&DocId=Data+Sheet%7F1773200%7FM%7Fpdf%7FEnglish%7FENG_DS_1773200_M.pdf%7F3-1676481-2, Composition="Thin Film", Device Class L1="Passive Components", Device Class L2=Resistors, Device Class L3="Chip SMD Resistors", Height=0.55mm, Ipc Land Pattern Name=RESC15580X45, Lead Free=Yes, Octopart=https://octopart.com/cpf0603d10ke-te+connectivity-22737789, octopart_url=https://octopart.com/cpf0603d10ke-te+connectivity-22737789, Packaging="5k Reel", RoHS=TRUE, Series=CPF
R5 R7 R8 R33: library part CMP-02407-004732-1, "RES Thick Film, 2.49Ω, 1%, 0.125W, 200ppm/°C, 0805", Case Code (Imperial)=0805, Case Code (Metric)=2012, Max Operating Temperature=155°C, Max Power Dissipation=125mW, Min Operating Temperature=-55°C, Package Quantity=5000, Resistance=2.49R, Temperature Coefficient=200ppm/°C, Tolerance=1%, Voltage Rating=150V, Case/Package=0805, Composition="Thick Film", Contact Plating=Tin, Features="Automotive AEC-Q200", Height=0.02inch, Lead Free="Lead Free", Length=0.079inch, Number of Terminations=2, Packaging="Tape and Reel", Power Rating=125mW, Radiation Hardening=No, Termination=SMD/SMT, Voltage Rating (DC)=150V, Weight=0.000194oz, Width=1.25mm
R11: library part CMP-2003-02213-1, Manufacturer="Vishay Dale", Part Number=CRCW120647K0FKEA
R12: library part CMP-2003-04372-1, Manufacturer="Vishay Dale", Part Number=WSL1206R2000FEA
R14 R15: library part CMP-250906-256246-1, "RES Thin Film,  196kΩ, 0.1%, 0.125W, 25ppm/°C, 0805"
R_IR4 R_IR5 R_IR6: library part CMP-2001-04915-1, Manufacturer="Vishay Dale", Part Number=CRCW080510R0FKEA
SW0: library part CMP-1696-00002-1, "Slide Switch, 500 V, -20 to 70 degC, 3-Pin THD, RoHS", Case\Package=SOT-23-5, Dropout Voltage="300 mV", Max Input Voltage="8 V", Max Operating Temperature="85 degC", Max Ouput Current="150 mA", Max Power Dissipation="250 mW", Min Input Voltage="4.3 V", Min Operating Temperature="-40 degC", Nominal Output Voltage="3.3 V", Package Quantity=3000, ComponentLink1Description="Manufacturer URL", ComponentLink1URL=http://www.e-switch.ch/en/, ComponentLink2Description=Datasheet, ComponentLink2URL=https://www.e-switch.com/system/asset/product_line/data_sheet/119/EG.pdf, DatasheetVersion=Oct-15, Height="1.3 mm", Length="3 mm", Mount="Surface Mount", Output Current="150 mA", Output Voltage="3.3 V", Outputs=1, PackageDescription="3-Pin Through Hole Device, Body 11.6 x 4 mm, Pitch 2.5 mm", PackageReference=EG1218, Packaging="Tape and Reel", Pins=5, Power Rating="250 mW", Radiation Hardening=No, REACH SVHC="No SVHC", RoHSCompliant=true, Width="1.8 mm"
U1: library part CMP-031-00007-1, "ARMÂ® CortexÂ®-M4 STM32F4 Microcontroller IC 32-Bit Single-Core 168MHz 1MB (1M x 8) FLASH 64-LQFP (10x10)", Case/Package="LQFP-64 STMicroelectronics", Check_prices=https://www.snapeda.com/parts/STM32F405RGT6/STMicroelectronics/view-part/?ref=eda, Component Type=Standard, Design Item ID=STM32F405RGT6, MF=STMicroelectronics, MP=STM32F405RGT6, Pins=64, SnapEDA_Link=https://www.snapeda.com/parts/STM32F405RGT6/STMicroelectronics/view-part/?ref=snap, Source=STM32F405RGT6.SchLib
U2: library part CMP-0062-01631-4, "800mA Low-Dropout Linear Regulator, 4-pin SOT-223, Pb-Free", Manufacturer="Texas Instruments", PackageTopMarking=XYTT*N05B, PowerWise=N, Code_IPC=SOT223-4, Code_JEDEC=TO-261-AA, ComponentLink1Description="Datasheet URL", ComponentLink1URL=http://www.ti.com/general/docs/lit/getliterature.tsp?genericPartNumber=LM1117-N&fileType=pdf, CompType="LDO IC", High-Reliability=Y, PackageDescription="Molded SOT-223, 6.50 x 3.56 x 1.6mm Body, 4 Lead, 2.3mm Pitch", PackageReference=DCY0004A, PartNumber=LM1117IMP-3.3/NOPB, PinCount=4, RoHS=Y
U3: library part CMP-031-00008-1, "Buck Switching Regulator IC Positive Adjustable 0.925V 1 Output 3A 8-SOIC (0.154, 3.90mm Width) Exposed Pad", Case/Package="SOIC-8 Monolithic Power", Availability="In Stock", Check_prices=https://www.snapeda.com/parts/MP2307DN-LF-Z/Monolithic+Power+Systems+Inc./view-part/?ref=eda, Component Type=Standard, Design Item ID=MP2307DN-LF-Z, MF="Monolithic Power", MP=MP2307DN-LF-Z, Pins=9, Price=None, Purchase-URL=https://pricing.snapeda.com/search/part/MP2307DN-LF-Z/?ref=eda, SnapEDA_Link=https://www.snapeda.com/parts/MP2307DN-LF-Z/Monolithic+Power+Systems+Inc./view-part/?ref=snap, Source=MP2307DN-LF-Z.SchLib
U4: library part CMP-0062-01640-3, "800mA Low-Dropout Linear Regulator, 4-pin SOT-223", Manufacturer="National Semiconductor", PackageTopMarking=XYTT*N06A, PowerWise=N, Code_IPC=SOT223-4, Code_JEDEC=TO-261-AA, ComponentLink1Description="Manufacturer URL", ComponentLink1URL=http://www.national.com/, ComponentLink2Description="LM1117 Datasheet", ComponentLink2URL=http://www.national.com/ds/LM/LM1117.pdf, ComponentLink3Description="LM1117 Web Page", ComponentLink3URL=http://www.national.com/pf/LM/LM1117.html, ComponentLink4Description="MP04A Package Page", ComponentLink4URL=http://www.national.com/packaging/folders/mp04a.html, CompType="LDO IC", DatasheetVersion=Apr-2006, High-Reliability=Y, PackageDescription="Molded SOT-223, 6.50 x 3.56 x 1.6mm Body, 4 Lead, 2.3mm Pitch", PackageReference=MP04A, PackageVersion="revB, Apr-2003", PartNumber=LM1117MP-5.0, PinCount=4, RevisionNote="SCH symbol layout adjusted", RoHS=N
U5: library part CMP-1529-00004-3, "IC MOTOR DRIVER PAR 16HTSSOP", Case/Package=HTSSOP, Max Operating Temperature=85°C, Max Output Current=2A, Max Supply Voltage=10.8V, Min Operating Temperature=-40°C, Min Supply Voltage=2.7V, Nominal Supply Current=3mA, Output Current=1.5A, Package Quantity=2000, Fault Protection="Over Temperature", Interface=PWM, Lead Free="Lead Free", Number of Outputs=2, Number of Pins=16, Output Current per Channel=1.5A, Packaging="Tape and Reel", Radiation Hardening=No, REACH SVHC="No SVHC", RMS Current (Irms)=1.5A, RoHS Compliant=Yes, Series=DRV8833, Supply Current=3mA, Technology=NMOS
U6: "Gyroscope X _Pitch_, Y _Roll_, Z _Yaw_ Â±125, 250, 500, 1000, 2000 25Hz ~ 3200Hz IÂ²C, SPI", Package="LGA-14 Bosch Tools", Availability=Unavailable, MF=Bosch, MP=BMG250, Price=None, SnapEDA_Link=https://www.snapeda.com/parts/BMG250/Bosch%20Sensortec/view-part/627823/?ref=snap
Y1: library part CMP-27762-010110-1, "CRYSTAL 16.0000MHZ 4PF SMD", Case/Package=SMD/SMT, ESR (Equivalent Series Resistance)=100R, Frequency Stability=10ppm, Load Capacitance=4pF, Max Operating Temperature=70°C, Min Operating Temperature=-20°C, Frequency=16MHz, Frequency Tolerance=10ppm, Mount="Surface Mount", Packaging="Tape and Reel", RoHS Compliant=Yes

## Via types
v1: diameter 0.5, hole 0.3, Top Layer to Bottom Layer, 117 vias
v2: diameter 1, hole 0.7, Top Layer to Bottom Layer, 19 vias
v3: diameter 0.5, hole 0.4, Top Layer to Bottom Layer, 16 vias
v4: diameter 2, hole 2, Top Layer to Bottom Layer, 11 vias
v5: diameter 0.8, hole 0.6, Top Layer to Bottom Layer, 3 vias
v6: diameter 2, hole 1.5, Top Layer to Bottom Layer, 2 vias
v7: diameter 0.7, hole 0.4, Top Layer to Bottom Layer, 1 vias
v8: diameter 1, hole 0.8, Top Layer to Bottom Layer, 1 vias
v9: diameter 0.8, hole 0.45, Top Layer to Bottom Layer, 1 vias
v10: diameter 1.8, hole 1.5, Top Layer to Bottom Layer, 1 vias
v11: diameter 0.6, hole 0.4, Top Layer to Bottom Layer, 1 vias
v12: diameter 1.6, hole 1.4, Top Layer to Bottom Layer, 1 vias
v13: diameter 2/2 (per signal layer), hole 2, Top Layer to Bottom Layer, 1 vias

## Nets (pads, with @x,y where several pads share a name; then routed paths per layer and width w, separated by ;. In a path a pad name is that pad's centre, name@x,y a point inside that pad or via, vN(x,y) a via of type N, cw(c..) or ccw(c..) an arc to the next point about the centre after c; other vN are vias at no path point)
3.3V: C6.1 C7.1 C8.1 C9.1 C11.1 C18.1 C_DB1.1 C_DB2.1 C_MPU1.1 C_MPU2.1 DEBUG_1.2 DEBUG_2.2 FB1.1 R1.1 R10.2 R_DBL1.2 R_DBL2.2 R_TX2.2 U1.1 U1.19 U1.32 U1.48 U1.64 U2.2 U2.4 U6.5 U6.8 | length 274.1
  Top Layer w0.254: R1.1@-23.525,77.05 -23.525,77.1 -22.05,78.575 -22.05,81.051 -21.741,81.361 -18.353,81.361 -17.947,81.767 v1(-17.88,81.767) ; v1(-17.125,9.875) -16.171,9.875 -11.413,14.633 -1.479,14.633 -0.873,14.027 C_DB2.1@-0.873,14 ; C11.1@-9.4,78.3 -10.675,79.575 v1(-10.725,79.575) -10.744,79.594 -10.744,83.485 -8.729,85.5 -8.729,92.796 v1(-7.35,94.175) ; C11.1@-9.35,78.3 -9.297,78.247 -8.325,78.247 U1.64@-6.711,76.633 -6.29,76.212 -6.29,74.338 U1.1@-6.711,73.917 ; v7(-4.4,94.925) -4.4,94.975 -5.175,95.75 -5.175,97.525 -2.948,99.752 -0.89,99.752 -0.573,99.435 -0.573,99.398 -0.25,99.075 R_DBL1.2@-0.213,99.075 ; R_DBL1.2@-0.2,99.075 2,99.075 R_DBL2.2@2.075,99 ; C_DB1.1@0.873,14 0,13.127 0,2.255 DEBUG_1.2@2,2.255 ; C7.1@1.925,84.32 1.928,84.317 1.928,83.966 1.709,83.748 1.709,82.394 1.728,82.375 1.308,81.954 U1.48@1.308,81.936 0.475,81.103 0.475,80.053 U1.32@6.611,73.917 7.603,72.925 9.205,72.925 9.224,72.906 9.244,72.925 C8.1@9.6,72.925 9.619,72.944 9.976,72.944 10.15,72.769 10.361,72.769 10.412,72.82 10.6,72.82 16.15,67.27 16.15,64.35 16.529,63.971 v2(16.529,61.225) 16.505,61.249 12.627,61.249 11.73,62.146 ; U1.19@2.015,69.321 3.706,67.63 3.706,66.994 C9.1@3.725,66.975 4.846,65.854 C_MPU1.1@9.025,65.854 ; C_MPU1.1@8.998,65.854 8.392,65.248 8.392,62.752 8.998,62.146 C_MPU2.1@9.025,62.146 11.73,62.146 ; C_MPU1.1@9.057,65.849 9.304,65.602 9.304,65.57 10.424,64.45 U6.5@11.8,64.45 ; U6.8@12.062,62.687 12.062,62.479 11.73,62.146
  Top Layer w0.5: FB1.1@-17.425,44.875 U2.4@-13.325,44.875 ; DEBUG_2.2@-2,2.255 0,2.255 ; C_DB2.1@-0.873,14 C_DB1.1@0.873,14
  Top Layer w0.7: C18.1@-16.725,35.426 -16.549,35.426 -13.8,38.175 -13.35,38.175 -13.15,38.375 v1(-13.15,38.8) -13.15,44.7 U2.4@-13.325,44.875 ; U2.4@-13.15,45.05 -13.145,45.05 -12.62,45.575 -12.62,75.08 C11.1@-9.4,78.3
  Top Layer w1: U2.4@-13.15,45.05 -13.125,45.075 -5.25,45.075 v6(-5.225,45.1)
  Bottom Layer w0.254: v1(-17.88,81.767) -12.917,81.767 v1(-10.725,79.575) ; v1(-17.125,9.875) -17.125,34.825 v1(-13.15,38.8) ; v1(-7.35,94.175) -5.15,94.175 v7(-4.4,94.925)
  Bottom Layer w1: v6(-5.225,45.1) 12.789,45.1 14.645,46.955 14.645,59.574 16.296,61.225 v2(16.529,61.225)